# Altium PCB BatteryManagementSystem.PcbDoc (part 2 of 2)
Units mil, origin at the board's own origin, x right, y up, seen from the top; angles counter-clockwise.
Board outline 5250 x 2500 mil, 4 copper layers (Top Layer, GND, 3V3, Bottom Layer); 232 components, 168 nets, 723 pads, 227 vias.
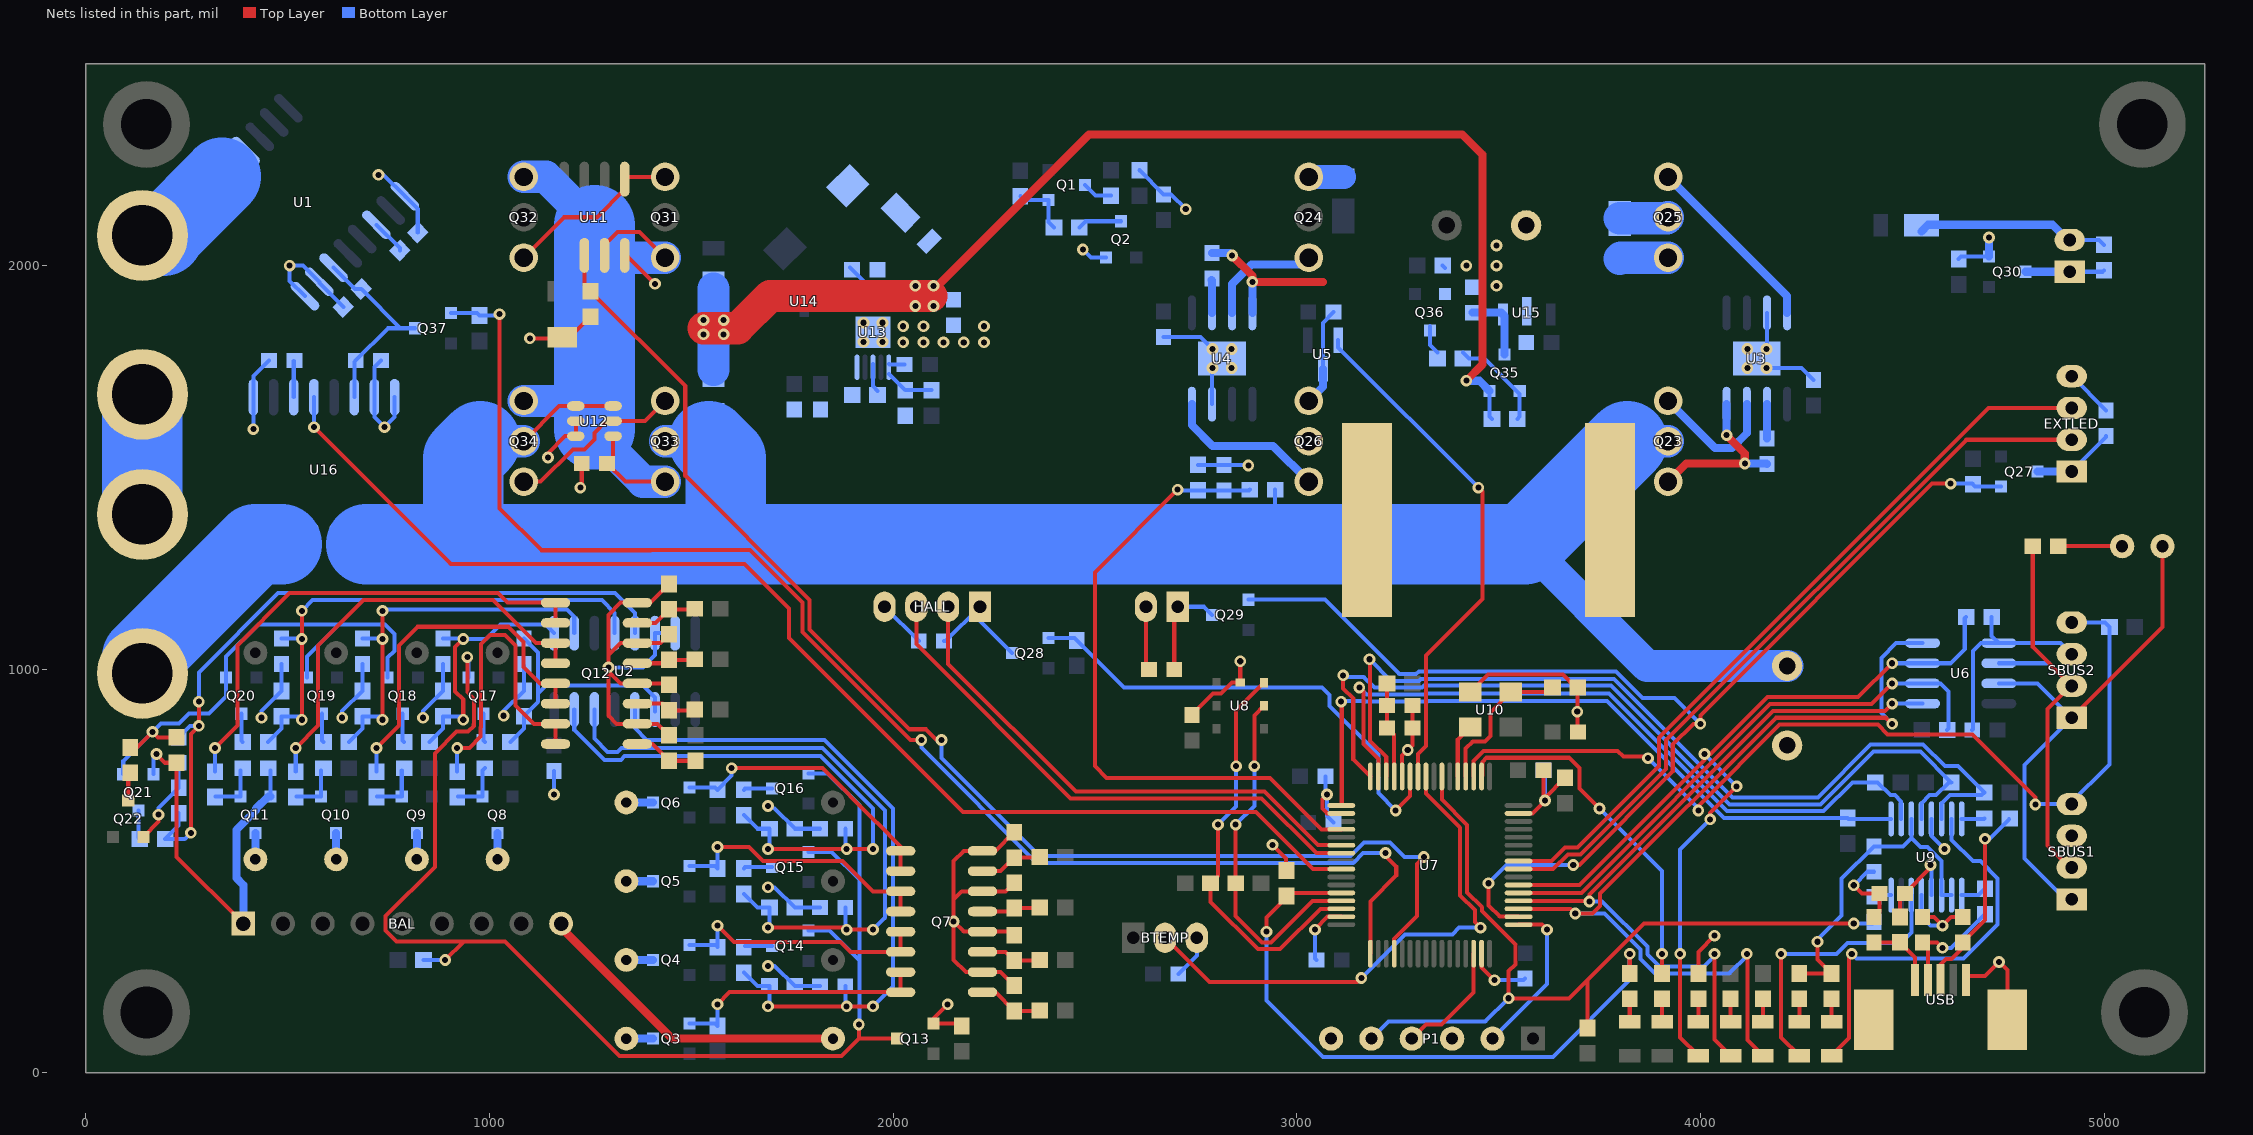
[diagram p4: the nets of this part, all layers, seen from the top]

## Via types
v1: diameter 29, hole 15, Top Layer to Bottom Layer, tented both sides, 227 vias

## Nets (pads, with @x,y where several pads share a name; then routed paths per layer and width w, separated by ;. In a path a pad name is that pad's centre, name@x,y a point inside that pad or via, vN(x,y) a via of type N, cw(c..) or ccw(c..) an arc to the next point about the centre after c; other vN are vias at no path point) (continued)
C8: BAL.1 Q11.S Q21.S R25.1 R51.1 | length 1002.7
  Top Layer w10: v1(175,790) 196.5,768.5 R51.1@225,768.5 225,535 BAL.1@390,370
  Bottom Layer w10: Q21.S@167.4,740.08 167.4,782.4 v1(175,790) ; Q11.S@457.4,685.08 R25.1@457.4,749.09
  Bottom Layer w20: BAL.1@390,370 390,466.04 373.47,482.57 373.47,602.36 421.87,650.76 421.87,655 451.95,685.08 Q11.S@457.4,685.08
CGND: BAL.9 R14.2 | length 811.6
  Top Layer w20: BAL.9@1167.4,370 BAL.9@1177.4,360 ; BAL.9@1177.4,370 BAL.9@1177.4,360 ; R14.2@1850.91,85 1452.4,85 BAL.9@1177.4,360
CLK8MHZ: U7.5 U10.3 | length 135.1
  Top Layer w10: U7.5@3398.9,734.49 3398.9,825.59 U10.3@3430,856.69
CLK_EN: R83.2 U7.4 U10.1 | length 380.9
  Top Layer w10: U7.4@3418.58,734.49 3418.58,803.58 3436.07,821.07 3466.07,821.07 3480,835 3480,893.31 U10.1@3530,943.31 3621.81,943.31 R83.2@3633.5,955
DEBUG_CTS: R75.2 U7.14 U9.6 | length 2236.3
  Top Layer w10: v1(3180,1025) 3182,1023 3182,822.04 3221.73,782.31 U7.14@3221.73,734.49
  Bottom Layer w10: v1(3180,1025) 3233.5,971.5 3303.02,971.5 3308.02,976.5 3785.62,976.5 4079.63,682.5 4290.92,682.5 4421.92,813.5 4552.04,813.5 4605.54,760 4638.5,760 4646.82,751.69 4647.14,751.69 4654.17,744.66 4654.17,744.34 R75.2@4703.5,695 4696.82,688.31 4618.2,688.31 4597.5,667.62 U9.6@4597.5,629.49
DEBUG_RTS: R74.2 U7.15 U9.2 | length 1803.8
  Top Layer w10: v1(3155,955) 3165,945 3165,815 3202.05,777.95 U7.15@3202.05,734.49
  Bottom Layer w10: v1(3155,955) 3172.5,937.5 3317.1,937.5 3319.6,940 3774.04,940 4065.55,648.5 4305,648.5 4376.5,720 R74.2@4433.5,720 4439.17,720 4470.86,688.31 4481.69,688.31 4497.5,672.5 U9.2@4497.5,629.49
DEBUG_RXI: R72.2 U7.17 U9.1 | length 1743.3
  Top Layer w10: v1(3110,920) 3111.5,918.5 3111.5,663.63 U7.17@3110.51,662.64
  Bottom Layer w10: v1(3110,920) 3111.5,921.5 3164.46,921.5 3165.46,920.5 3324.14,920.5 3325.14,921.5 3768.5,921.5 4058.5,631.5 R72.2@4365,631.5 4367.01,629.49 U9.1@4472.5,629.49
DEBUG_TXO: R73.2 U7.16 U9.4 | length 2141.2
  Top Layer w10: v1(3115,985) 3115,952.48 3140,927.48 3140,776.85 U7.16@3182.36,734.49
  Bottom Layer w10: v1(3115,985) 3118.5,981.5 3165.98,981.5 3192.98,954.5 3310.06,954.5 3315.06,959.5 3778.58,959.5 4072.59,665.5 4297.96,665.5 4428.96,796.5 4545,796.5 R73.2@4621.5,720 4615.83,720 4584.14,688.31 4568.2,688.31 4547.5,667.62 U9.4@4547.5,629.49
DISCHARGE_EN: R86.1 U7.36 U11.2 | length 3242.1
  Top Layer w10: U11.2@1235,2025.51 1235,1951.5 R86.1@1250,1936.5 1485,1701.5 1485,1479.6 1792.5,1172.1 1792.5,1099.16 2040.16,851.5 2080.98,851.5 2107.48,825 v1(2120,825) ; U7.36@3241.42,295.51 3241.42,332.38 3297.5,388.46 3297.5,517.5 v1(3315,535)
  Bottom Layer w10: v1@2110,825 2120,815 2120,780 2362.5,537.5 3132.96,537.5 3166.96,571.5 3230.98,571.5 3267.48,535 v1(3315,535)
EXTLED_5V_E\N\: Q27.G Q29.G R61.2 U7.50 | length 3118
  Top Layer w10: v1(3475,470) 3475.5,469.5 3475.5,414.5 3502.95,387.05 U7.50@3549.49,387.05 ; v1(3685,515) 3700,515 3931.5,746.5 3931.5,813.98 3982.52,865 v1(4000,865) 4000,885.96 4574.04,1460 v1(4620,1460)
  Bottom Layer w10: Q29.G@2880.08,1172.4 3070.07,1172.4 3253.98,988.5 3295.98,988.5 3302.48,995 3791.17,995 3856.67,929.5 3935.5,929.5 v1@3992.5,872.5 ; v1(3475,470) 3520,515 v1(3685,515) ; v1(4620,1460) 4673.5,1460 R61.2@4675,1458.5 4680.91,1452.6 Q27.G@4744.92,1452.6
EXTLED_CLK: EXTLED.2 U7.56 | length 1853.1
  Top Layer w10: U7.56@3549.49,505.16 3615.16,505.16 3615,505 3635,505 3671.5,541.5 3702.46,541.5 3914.5,753.54 3914.5,824.5 4658.74,1568.74 EXTLED.2@4920,1568.74
EXTLED_DATA: EXTLED.3 U7.57 | length 1877.1
  Top Layer w10: U7.57@3549.49,524.84 3630.8,524.84 3664.46,558.5 3695.42,558.5 3897.5,760.58 3897.5,831.54 4713.44,1647.48 EXTLED.3@4920,1647.48
GND: BAT.- BTEMP.3 C1.2 C2.2 C3.2 C4.2 C5.2 C6.2 C7.2 C8.2 C9.2 C10.2 C11.2 C12.2 C13.2 C14.2 C15.2 C16.2 C19.2 C20.1 C21.2 C22.2 C23.1 C24.1 C25.2 C26.2 C27.2 C28.2 C29.2 C31.2 C32.2 C33.2 C34.2 C35.2 C36.2 C37.2 C38.2 C39.2 C40.2 C41.1 C42.1 C44.2 C45.2 C46.2 C48.2 C49.2 C50.2 C51.2 C52.2 D2.A D5.A EXTLED.4 FAN.2 HALL.4 P1.3 Q2.S Q7.10 Q7.12 Q7.14 Q7.16 Q12.10 Q12.12 Q12.14 Q12.16 Q13.S Q22.S Q25.S Q26.S Q30.S Q36.S R4.2 R5.2 R18.2 R19.2 R20.2 R21.2 R38.2 R39.2 R40.2 R41.2 R47.2 R48.2 R49.2 R50.2 R57.2 R58.2 R59.2 R60.2 R64.2 R67.2 R68.2 R81.2 R82.2 R83.1 R86.2 R87.2 R89.2 R92.2 R94.2 RAIL.- SBUS1.3 SBUS2.3 U1.9 U1.15 U1.16 U2.6 U2.7 U3.7 U4.7 U5.3 U6.5 U7.12 U7.18 U7.31 U7.47 U7.63 U8.7 U9.5 U9.13 U10.2 U11.4 U12.2 U12.3 U13.10 U13.PAD U14.1 U15.2 U16.9 U16.15 U16.16 USB.5 USB.SHD | length 10236
  Top Layer w10: Q22.S@142.4,584.92 180,622.52 v1(180,640) ; v1(1100,1820) 1177.09,1820 C41.1@1180,1822.91 1199.41,1822.91 R86.2@1250,1873.5 ; v1(1145,1525) 1145,1535 1187.6,1577.6 U12.3@1213.74,1577.6 U12.2@1213.74,1615 ; v1(1225,1450) 1228.5,1453.5 C42.1@1228.5,1510 ; U11.4@1335,2000 U11.4@1335,2025.51 1339.49,2025.51 v1(1410,1955) ; R38.2@1445,836.5 1416.5,865 Q12.10@1366.38,865 1315,865 1295,885 v1@1295,995 ; R39.2@1445,961.5 1441.5,965 Q12.12@1366.38,965 1325,965 v1@1295,995 ; R40.2@1445,1086.5 1423.5,1065 Q12.14@1366.38,1065 1325,1065 1295,1035 ; R41.2@1445,1211.5 1398.5,1165 Q12.16@1366.38,1165 1325,1165 1295,1135 1295,1035 ; v1(2135,170) 2100.08,135.08 Q13.S@2100.08,122.4 2164.09,122.4 R5.2@2170,116.5 ; R18.2@2300,216.5 2266.5,250 Q7.10@2221.38,250 2180,250 2150,280 v1(2150,375) ; R19.2@2300,341.5 2291.5,350 Q7.12@2221.38,350 2175,350 v1(2150,375) ; R20.2@2300,471.5 2278.5,450 Q7.14@2221.38,450 2170,450 2150,430 ; R21.2@2300,596.5 2253.5,550 Q7.16@2221.38,550 2175,550 2150,525 2150,430 ; FAN.2@2626.26,1155 2626.26,1007.24 C22.2@2633.5,1000 ; C25.2@2740,886.5 2740,887.68 2792.32,940 2812.48,940 2839.57,967.09 U8.7@2860,967.09 v1(2860,1020) ; BTEMP.3@2752.48,335 BTEMP.3@2752.48,359.02 ; v1(2940,565) 2973.5,531.5 R81.2@2973.5,501.5 ; v1(3045,355) 3045,355.72 3076.33,387.05 U7.31@3110.51,387.05 ; v1(3075,690) 3064.06,679.06 3064.06,655.22 3075.05,644.24 3075.05,642.95 U7.18@3110.51,642.95 ; U7.12@3261.1,734.49 3261.1,786.1 3286.5,811.5 C38.2@3286.5,900 ; U10.2@3430,943.31 3473.38,986.69 3659.14,986.69 3690.83,955 R83.1@3696.5,955 3695,953.5 v1(3695,895) 3695,846.5 C37.2@3696.5,845 ; U7.47@3457.95,295.51 3457.95,261.33 3489.28,230 v1(3490,230) ; U7.63@3549.49,642.95 3583.67,642.95 3615,674.28 v1(3615,675) ; C40.2@3621.5,750 C40.2@3611.5,750 3611.5,678.5 v1(3615,675) ; R82.2@3665,731.5 3615,681.5 v1(3615,675) ; R68.2@3995,246.5 3995,300 v1(4035,340) ; v1(4380,465) 4400,445 C29.2@4443.5,445 4443.5,400 C26.2@4430,386.5 ; C27.2@4550,386.5 4578.5,386.5 v1(4600,365) 4621.5,386.5 C28.2@4650,386.5 ; USB.5@4657.99,240 4705,240 v1(4740,275) ; v1@4746.5,281.5 v1(4740,275) ; USB.SHD@4760.35,141.57 4760.35,254.65 v1(4740,275) ; v1@1295,995 v1(1295,1005) 1295,1035 ; v1(2150,375) 2150,430
  Bottom Layer w10: v1(180,640) 180,656.5 R60.2@230,706.5 C12.2@230,768.5 C12.2@230.22,768.5 ; v1(415,1595) U16.9@415,1674.13 415,1726.5 C51.2@453.5,1765 ; v1(435,880) 435,896.5 R59.2@485,946.5 C11.2@485,1013.5 ; U1.16@542.92,1924.59 505,1962.51 v1(505,2000) 538.22,2000 U1.15@578.28,1959.94 578.28,1957.18 C1.2@637.73,1897.73 ; v1(635,880) 635,896.5 R58.2@685,946.5 C10.2@685,1013.5 ; v1(725,2225) 737.49,2225 U1.9@790.41,2172.08 822.27,2140.22 C3.2@822.27,2082.27 ; C50.2@731.5,1765 715,1748.5 U16.15@715,1674.13 715,1625 v1(740,1600) 765,1625 U16.16@765,1674.13 ; v1(835,880) 835,896.5 R57.2@885,946.5 C9.2@885,1013.5 ; v1(1035,885) 1035,896.5 R50.2@1085,946.5 C8.2@1085,1010 ; v1(1160,690) C2.2@1160,748.5 ; v1(1295,1005) 1380,1005 1410,1035 U2.6@1410,1089.49 U2.7@1460,1089.49 ; v1(1690,265) 1706.5,265 R47.2@1756.5,215 C5.2@1818.5,215 ; v1(1690,460) 1706.5,460 R48.2@1756.5,410 C6.2@1818.5,410 ; v1@1690,655 v1(1690,661.25) ; 1706.5,655 R49.2@1756.5,605 C7.2@1818.5,605 ; HALL.4@1978.78,1154.72 C21.2@2063.5,1070 ; v1(2470,2040) 2490.08,2019.92 Q2.S@2527.6,2019.92 ; R4.2@2610,2236.5 C4.2@2670,2176.5 2688.5,2176.5 v1(2725,2140) ; C16.2@2670,1823.5 2761.5,1823.5 v1(2791.38,1793.62) ; C20.1@2706.5,245 2752.48,290.98 BTEMP.3@2752.48,335 BTEMP.3@2752.48,360 ; R94.2@2755,1506.5 C52.2@2820,1506.5 2878.5,1506.5 v1(2880,1505) ; U4.7@2790,1656.81 2790,1745 v1(2791.38,1746.38) ; v1(3045,355) 3045,283.5 C32.2@3048.5,280 ; U5.3@3065,1744.57 3065,1858.5 C23.1@3091.5,1885 ; C36.2@3071.5,735 3071.5,693.5 v1(3075,690) 3075,636.5 C35.2@3091.5,620 ; R92.2@3361.5,2000 R92.2@3367.4,1994.09 ; v1(3490,230) 3561.5,230 C33.2@3565,233.5 ; C34.2@3611.5,750 3615,746.5 v1(3615,675) ; v1(4163.62,1746.38) 4250.12,1746.38 C15.2@4280,1716.5 ; v1(4163.62,1793.62) 4165,1795 U3.7@4165,1883.19 ; v1(4380,465) 4413.5,498.5 C31.2@4430,498.5 ; U9.13@4547.5,440.51 4547.5,387.5 4570,365 v1(4600,365) ; U9.5@4572.5,629.49 4572.5,587.5 v1(4605,555) ; R64.2@4640,2016.5 4645.91,2022.4 Q30.S@4714.92,2022.4 ; C24.1@4673.5,850 4675,851.5 4675,1045 4695,1065 U6.5@4739.49,1065 ; v1@4714.92,2069.92 v1(4715,2070) ; R67.2@4721.5,1130 4721.5,1082.99 U6.5@4739.49,1065 ; SBUS2.3@4920,1037.48 4892.48,1065 U6.5@4739.49,1065 ; EXTLED.4@4920,1726.22 4920.28,1726.22 C19.2@5005,1641.5
  Bottom Layer w20: Q26.S@3030,1665 3065,1700 U5.3@3065,1744.57 ; Q30.S@4714.92,2022.4 v1@4714.92,2069.92
  Bottom Layer w80: D2.A@3800,2017.01 3802.99,2020 Q25.S@3920,2020
  Bottom Layer w200: RAIL.-@140,1383.7 BAT.-@140,1681.3
  other v1: 3275,800 2838.62,1746.38 4116.38,1746.38 2838.62,1793.62 4116.38,1793.62 2025,1810 2075,1810 2125,1810 2175,1810 2225,1810 1926.38,1811.38 1973.62,1811.38 2025,1850 2075,1850 2225,1850 1926.38,1858.62 1973.62,1858.62 3495,1950 3420,2000 3495,2000 3495,2050
HALL_3V3_E\N\: Q28.G R62.2 U7.11 | length 1208
  Top Layer w10: v1(3245,650) 3280.79,685.79 U7.11@3280.79,734.49
  Bottom Layer w10: Q28.G@2385.08,1077.4 2449.09,1077.4 R62.2@2455,1071.5 2571.5,955 3062.48,955 3081.5,935.98 3081.5,909.04 3202,788.54 3202,693 v1(3245,650)
HALL_CHARGE: HALL.3 U7.23 | length 1360.1
  Top Layer w10: HALL.3@2057.52,1155 2057.52,1062.48 2439.83,680.17 2912.92,680.17 3048.56,544.53 U7.23@3110.51,544.53
HALL_DISCHARGE: HALL.2 U7.22 | length 1301.7
  Top Layer w10: HALL.2@2136.26,1155 2136.26,1013.74 2452.83,697.17 2919.96,697.17 3052.91,564.21 U7.22@3110.51,564.21
I2C_SCL: R69.2 U7.29 U8.5 | length 882
  Top Layer w10: v1(2848.5,615) R69.2@2848.5,470 2848.5,389.02 2914.02,323.5 2935.98,323.5 3038.89,426.42 U7.29@3110.51,426.42 ; v1(2895,760) 2895,885.94 U8.5@2919.06,910
  Bottom Layer w10: v1(2848.5,615) 2895,661.5 v1(2895,760)
I2C_SDA: R70.2 U7.30 U8.6 | length 1012.5
  Top Layer w10: v1(2805,615) 2805,488.5 R70.2@2786.5,470 2786.5,423.5 2903.5,306.5 2959.02,306.5 3059.26,406.73 U7.30@3110.51,406.73 ; v1(2850,760) 2850,898.03 U8.6@2919.06,967.09
  Bottom Layer w10: v1(2805,615) 2850,660 v1(2850,760)
ISENS_3V3_E\N\: Q37.G R95.2 U7.33 | length 3514.9
  Top Layer w10: v1(1025,1880) 1025,1399 1129,1295 1399.05,1295 1399.22,1295.17 1645.39,1295.17 1775.5,1165.06 1775.5,1092.12 2042.62,825 v1(2070,825) ; U7.33@3182.36,295.51 3182.36,424.89 3246.5,489.02 3246.5,510.98 3220,537.48 v1(3220,545)
  Bottom Layer w10: Q37.G@905.08,1882.4 969.09,1882.4 R95.2@975,1876.5 1021.5,1876.5 v1(1025,1880) ; v1(2070,825) 2070,805.96 2355.46,520.5 3140,520.5 3164.5,545 v1(3220,545)
LED1: R81.1 R84.2 U7.28 | length 1563.5
  Top Layer w10: v1@2920.75,354.25 2925,358.5 2925,385 2986.1,446.1 U7.28@3110.51,446.1 ; R84.2@3825,246.5 v1(3825,295)
  Bottom Layer w10: v1(2925,350) 2925,180 3065,40 3635,40 3825,230 v1(3825,295)
LED2: R85.2 U7.2 | length 885.5
  Top Layer w10: U7.2@3457.95,734.49 3459.73,736.27 3459.73,770.45 3470.22,780.94 3674.06,780.94 3700,755 3700,705 v1(3750,655) ; R85.2@3905,246.5 v1(3905,295)
  Bottom Layer w10: v1(3750,655) 3905,500 v1(3905,295)
NetBAT_+: BAT.+ U1.1 U1.2 U1.3 U1.4 | length 257.8
  Bottom Layer w193: BAT.+@192,2075 337.5,2220.5
  Bottom Layer w200: BAT.+@140,2075 BAT.+@192,2075
NetBUZZER_1: BUZZER.1 Q30.D R63.2 | length 196.4
  Bottom Layer w10: BUZZER.1@4910,1985 4996.5,1985 R63.2@5000,1988.5
  Bottom Layer w20: Q30.D@4805.08,1985 BUZZER.1@4910,1985
NetBUZZER_2: BUZZER.2 D3.C R63.1 | length 480.1
  Bottom Layer w10: BUZZER.2@4910,2063.74 4987.76,2063.74 R63.1@5000,2051.5
  Bottom Layer w20: D3.C@4547.4,2085 4563.9,2101.5 4872.24,2101.5 BUZZER.2@4910,2063.74
NetC1_1: C1.1 C50.1 Q37.D U1.14 U16.14 | length 500
  Bottom Layer w10: U1.14@613.63,1995.3 666.66,1942.27 C1.1@682.27,1942.27 779.54,1845 ; U16.14@665,1674.13 665,1761.5 C50.1@668.5,1765 748.5,1845 779.54,1845 ; Q37.D@814.92,1845 779.54,1845
NetC3_1: C3.1 U1.11 | length 87.7
  Bottom Layer w10: U1.11@719.7,2101.37 777.73,2043.34 C3.1@777.73,2037.73
NetC5_1: C5.1 R43.2 R47.1 U2.12 | length 1719.2
  Top Layer w10: v1(1690,165) v1(1885,165) v1(1950,165)
  Bottom Layer w10: U2.12@1360,900.51 1360,854.5 1389.5,825 1830,825 1999.5,655.5 1999.5,214.5 v1(1950,165) ; R43.2@1630,248.5 1663.5,215 R47.1@1693.5,215 1693.5,168.5 v1(1690,165) ; C5.1@1881.5,215 1881.5,168.5 v1(1885,165)
NetC6_1: C6.1 R44.2 R48.1 U2.14 | length 1628.3
  Top Layer w10: v1(1690,360) 1880,360 v1(1885,355) v1(1950,355)
  Bottom Layer w10: U2.14@1260,900.51 1260,828.28 1292.78,795.5 1317.22,795.5 1326.72,805 1825,805 1979.5,650.5 1979.5,384.5 v1(1950,355) ; R44.2@1630,443.5 1663.5,410 R48.1@1693.5,410 1693.5,363.5 v1(1690,360) ; C6.1@1881.5,410 1881.5,358.5 v1(1885,355)
NetC7_1: C7.1 R45.2 R49.1 U2.15 | length 1419.4
  Top Layer w10: v1(1690,555) v1(1885,555) v1(1950,555)
  Bottom Layer w10: U2.15@1210,900.51 1210,850 1284.5,775.5 1325.5,775.5 1335,785 1820,785 1950,655 v1(1950,555) ; R45.2@1630,638.5 1663.5,605 R49.1@1693.5,605 1693.5,558.5 v1(1690,555) ; C7.1@1881.5,605 1881.5,558.5 v1(1885,555)
NetC8_1: C8.1 R46.2 R50.1 U2.11 | length 644.6
  Bottom Layer w10: R46.2@1051.5,820 1085,853.5 R50.1@1085,883.5 1085,884.93 1119.69,919.61 1119.69,940 ; C8.1@1085,1076.5 1119.69,1041.81 1119.69,940 ; U2.11@1410,895.51 1410,930 1380,960 1139.69,960 1119.69,940
NetC9_1: C9.1 R53.2 R57.1 U2.1 | length 647.1
  Top Layer w10: v1(935,875) 935,925 915,945 915,1055 v1(935,1075)
  Bottom Layer w10: R53.2@851.5,820 885,853.5 R57.1@885,883.5 926.5,883.5 v1(935,875) ; C9.1@885,1076.5 933.5,1076.5 v1(935,1075) 991.12,1075 1027.3,1111.18 1138.31,1111.18 U2.1@1160,1089.49
NetC10_1: C10.1 R54.2 R58.1 U2.2 | length 975.6
  Top Layer w10: v1(735,875) v1(735,1075) v1(735,1145)
  Bottom Layer w10: R54.2@651.5,820 685,853.5 R58.1@685,883.5 726.5,883.5 v1(735,875) ; C10.1@685,1076.5 733.5,1076.5 v1(735,1075) ; v1(735,1145) 737.8,1147.8 1192.2,1147.8 1210,1130 U2.2@1210,1089.49
NetC11_1: C11.1 R55.2 R59.1 U2.4 | length 1286.9
  Top Layer w10: v1(535,875) v1(535,1075) v1(535,1145)
  Bottom Layer w10: R55.2@451.5,820 485,853.5 R59.1@485,883.5 v1@526.5,883.5 ; C11.1@485,1076.5 v1@533.5,1076.5 ; v1(535,1145) 561.5,1171.5 1278.5,1171.5 1310,1140 U2.4@1310,1089.49
NetC12_1: C12.1 R56.2 R60.1 U2.5 | length 1846.3
  Top Layer w10: v1(260,595) 260,840 v1(280,860) v1(280,920)
  Bottom Layer w10: R60.1@230,643.5 230,613.5 R56.2@196.5,580 245,580 v1(260,595) ; C12.1@230,831.5 258.5,860 v1(280,860) ; v1(280,920) 280,992.16 476.34,1188.5 1311.5,1188.5 1360,1140 U2.5@1360,1089.49
NetC17_1: C17.1 D2.C L1.1 Q23.S Q25.D U3.4 | length 550.8
  Top Layer w20: Q23.S@3920,1465 3965,1510 v1(4110,1510) 4110,1535 v1(4065,1580)
  Bottom Layer w20: v1(4065,1580) U3.4@4065,1656.81 ; v1(4110,1510) 4163.5,1510 C17.1@4165,1508.5
  Bottom Layer w80: D2.C@3800,2117.4 3917.4,2117.4 Q25.D@3920,2120
NetC17_2: C17.2 U3.2 | length 85.3
  Bottom Layer w20: C17.2@4165,1571.5 U3.2@4165,1656.81
NetC18_1: C18.1 D1.A L1.2 Q24.S Q26.D U4.4 | length 477.2
  Top Layer w20: v1(2840,2025) 2890,1975 v1(2890,1960) 3065,1960
  Bottom Layer w20: C18.1@2790,2031.5 2833.5,2031.5 v1(2840,2025) ; U4.4@2890,1883.19 v1(2890,1960)
  Bottom Layer w60: Q24.S@3030,2220 D1.A@3117.01,2220
NetC18_2: C18.2 U4.2 | length 82.4
  Bottom Layer w20: C18.2@2788.5,1965 2790,1963.5 U4.2@2790,1883.19
NetC19_1: C19.1 EXTLED.1 Q27.D | length 208.6
  Bottom Layer w10: EXTLED.1@4920,1490 5005,1575 C19.1@5005,1578.5
  Bottom Layer w20: Q27.D@4835.08,1490 EXTLED.1@4920,1490
NetC21_1: C21.1 HALL.1 Q28.D | length 271.8
  Bottom Layer w10: C21.1@2126.5,1070 2130,1070 HALL.1@2215,1155 2215,1119.92 Q28.D@2294.92,1040
NetC22_1: C22.1 FAN.1 Q29.D | length 251.7
  Top Layer w10: C22.1@2696.5,1000 2696.5,1146.5 FAN.1@2705,1155
  Bottom Layer w10: FAN.1@2705,1155 2769.92,1155 Q29.D@2789.92,1135
NetC26_1: C26.1 FB1.2 USB.1 | length 173.8
  Top Layer w10: C26.1@4430,323.5 FB1.2@4495,323.5 4495,323.15 4532.01,286.14 USB.1@4532.01,230
NetC27_1: C27.1 R78.1 USB.2 | length 284.3
  Top Layer w10: USB.2@4563.5,240 4563.5,310 C27.1@4550,323.5 4586.5,323.5 v1(4600,310)
  Bottom Layer w10: v1(4600,310) 4621.5,310 R78.1@4705,393.5
NetC28_1: C28.1 R79.1 USB.3 | length 483.6
  Top Layer w10: USB.3@4595,230 4595,268.5 4608.75,282.25 4622.25,282.25 4650,310 C28.1@4650,323.5 4705,378.5 v1(4705,580)
  Bottom Layer w10: v1(4705,580) 4716.5,580 R79.1@4765,628.5
NetC29_1: C29.1 FB1.1 U9.12 | length 235.1
  Top Layer w10: FB1.1@4495,386.5 4495,433.5 C29.1@4506.5,445 4570,508.5 v1(4570,515)
  Bottom Layer w10: v1(4570,515) 4572.5,512.5 U9.12@4572.5,440.51
NetC30_1: C30.1 U9.16 | length 33.5
  Bottom Layer w10: C30.1@4439.02,440.51 U9.16@4472.5,440.51
NetC38_1: C38.1 C39.1 FB2.1 U7.13 | length 234.7
  Top Layer w10: FB2.1@3223.5,955 3223.5,845 3235,845 3241.42,838.58 U7.13@3241.42,734.49
NetC42_2: C42.2 Q31.S Q32.S Q33.S Q34.S U11.3 U12.4 | length 1626.3
  Top Layer w10: U11.3@1285,2025.51 1285,2051.84 1316.98,2083.82 1371.18,2083.82 Q31.S@1435,2020 ; U12.4@1306.26,1577.6 1306.26,1524.76 C42.2@1291.5,1510 1336.5,1465 Q33.S@1435,1465
  Bottom Layer w80: Q34.S@1085,1665 1190,1665 ; Q32.S@1085,2220 1140,2220 1260,2100 ; 1260,1595 1260,1585 1380,1465 Q33.S@1435,1465 ; 1330,2020 Q31.S@1435,2020
  Bottom Layer w200: 1260,1595 1260,2100
NetC43_1: C43.1 U13.2 | length 88.6
  Bottom Layer w10: C43.1@1893.5,1995 1930.31,1958.19 U13.2@1930.31,1921.61
NetC43_2: C43.2 D5.C L2.1 U13.3
NetC44_1: C44.1 D4.C D6.C Q35.S R90.2 U13.4 U13.5 | length 3077.6
  Top Layer w20: 2095,1935 2485,2325 3410,2325 3460,2275 3460,1755 v1(3420,1715) ; v1@2095,1940 v1@2095,1955
  Top Layer w80: 1530,1845 1615,1845 1695,1925 2095,1925
  Bottom Layer w10: Q35.S@3477.6,1689.92 3477.6,1625.91 R90.2@3483.5,1620
  Bottom Layer w20: v1@3420.08,1714.92 v1(3420,1715) 3452.52,1715 Q35.S@3477.6,1689.92
  Bottom Layer w80: D4.C@1555,1742.4 D6.C@1555,1942.6
  other v1: 1530,1830 1580,1830 1530,1865 1580,1865 2055,1900 2100,1900 2055,1950 2100,1950
NetC47_1: C47.1 R88.2 R89.1 U13.6 | length 162.4
  Bottom Layer w10: U13.6@1989.37,1732.13 R89.1@2030,1691.5 R88.2@2095,1691.5 ; U13.6@1989.37,1756.85 1991.22,1755 C47.1@2028.5,1755
NetC48_1: C48.1 Q35.D U15.3 | length 178.5
  Bottom Layer w20: C48.1@3435,1883.5 3506.57,1883.5 U15.3@3510.94,1879.13 3515,1875.08 Q35.D@3515,1780.08
NetC51_1: C51.1 U16.11 | length 89.4
  Bottom Layer w10: U16.11@515,1674.13 C51.1@515,1763.5
NetGP1_C: GP1.C R84.1 | length 56.2
  Top Layer w10: GP1.C@3825,127.32 R84.1@3825,183.5
NetGP2_C: GP2.C R85.1 | length 56.2
  Top Layer w10: GP2.C@3905,127.32 R85.1@3905,183.5
NetQ1_D: Q1.D R3.1 | length 75.9
  Bottom Layer w10: Q1.D@2475.08,2200 2501.57,2173.5 R3.1@2540,2173.5
NetQ1_G: Q1.G R1.2 R2.1 | length 147
  Bottom Layer w10: R1.2@2315,2172.01 2324.41,2162.6 Q1.G@2384.92,2162.6 2384.92,2108.58 R2.1@2398.5,2095
NetQ2_D: Q2.D R2.2 | length 109.7
  Bottom Layer w10: R2.2@2461.5,2095 2476.57,2110.08 Q2.D@2565,2110.08
NetQ3_D: Q3.D R14.1 | length 65.8
  Bottom Layer w20: R14.1@1339.09,85 Q3.D@1404.92,85
NetQ3_G: Q3.G Q7.7 R6.2 | length 641.9
  Top Layer w10: v1(1565,170) 1595,200 Q7.7@2018.62,200 Q7.7@2018.62,250
  Bottom Layer w10: Q3.G@1495.08,122.4 1559.09,122.4 R6.2@1565,116.5 v1(1565,170)
NetQ4_D: Q4.D R15.1 | length 65.8
  Bottom Layer w20: R15.1@1339.09,280 Q4.D@1404.92,280
NetQ4_G: Q4.G Q7.5 R7.2 | length 648.1
  Top Layer w10: v1(1565,365) 1605.47,324.53 1869.35,324.53 1893.88,300 Q7.5@2018.62,300 Q7.5@2018.62,350
  Bottom Layer w10: Q4.G@1495.08,317.4 R7.2@1559.09,317.4 ; R7.2@1565,311.5 v1(1565,365)
NetQ5_D: Q5.D R16.1 | length 65.8
  Bottom Layer w20: R16.1@1339.09,475 Q5.D@1404.92,475
NetQ5_G: Q5.G Q7.3 R8.2 | length 675.1
  Top Layer w10: v1(1565,560) 1643.28,560 1677.78,525.5 1874.5,525.5 1950,450 Q7.3@2018.62,450 Q7.3@2018.62,400
  Bottom Layer w10: Q5.G@1495.08,512.4 1559.09,512.4 R8.2@1565,506.5 v1(1565,560)
NetQ6_D: Q6.D R17.1 | length 65.8
  Bottom Layer w20: R17.1@1339.09,670 Q6.D@1404.92,670
NetQ6_G: Q6.G Q7.1 R9.2 | length 700.6
  Top Layer w10: v1(1600,755) 1824.79,755 1960.63,619.17 1960.83,619.17 2018.62,561.38 Q7.1@2018.62,550 Q7.1@2018.62,500
  Bottom Layer w10: Q6.G@1495.08,707.4 1559.09,707.4 R9.2@1565,701.5 1600,736.5 v1(1600,755)
NetQ7_9: Q7.9 R10.2 R18.1 | length 159.9
  Top Layer w10: Q7.9@2221.38,200 2253.5,200 R18.1@2300,153.5 R10.2@2362.01,153.5
NetQ7_11: Q7.11 R11.2 R19.1 | length 149.5
  Top Layer w10: Q7.11@2221.38,300 2278.5,300 R19.1@2300,278.5 R11.2@2362.01,278.5
NetQ7_13: Q7.13 R12.2 R20.1 | length 144.2
  Top Layer w10: Q7.13@2221.38,400 2291.5,400 R20.1@2300,408.5 R12.2@2362.01,408.5
NetQ7_15: Q7.15 R13.2 R21.1 | length 154.5
  Top Layer w10: Q7.15@2221.38,500 2266.5,500 R21.1@2300,533.5 R13.2@2362.01,533.5
NetQ8_D: Q8.D R34.1 | length 65.8
  Bottom Layer w20: R34.1@1020,529.09 Q8.D@1020,594.92
NetQ8_G: Q8.G R22.2 R26.1 | length 133.4
  Bottom Layer w10: R26.1@921.57,685.08 Q8.G@982.6,685.08 982.6,749.09 R22.2@988.5,755
NetQ9_D: Q9.D R35.1 | length 65.8
  Bottom Layer w20: R35.1@820,529.09 Q9.D@820,594.92
NetQ9_G: Q9.G R23.2 R27.1 | length 125
  Bottom Layer w10: R27.1@721.57,685.08 Q9.G@782.6,685.08 R23.2@782.6,749.09
NetQ10_D: Q10.D R36.1 | length 65.8
  Bottom Layer w20: R36.1@620,529.09 Q10.D@620,594.92
NetQ10_G: Q10.G R24.2 R28.1 | length 125
  Bottom Layer w10: R28.1@521.57,685.08 Q10.G@582.6,685.08 R24.2@582.6,749.09
NetQ11_D: Q11.D R37.1 | length 65.8
  Bottom Layer w20: R37.1@420,529.09 Q11.D@420,594.92
NetQ11_G: Q11.G R25.2 R29.1 | length 125
  Bottom Layer w10: R29.1@321.57,685.08 Q11.G@382.6,685.08 R25.2@382.6,749.09
NetQ12_1: Q12.1 R29.2 | length 1237.2
  Top Layer w10: v1(320,805) 375.47,860.47 375.47,1059.35 504.62,1188.5 1021.5,1188.5 1045,1165 Q12.1@1163.62,1165 Q12.1@1163.62,1115
  Bottom Layer w10: R29.2@320,746.5 v1(320,805)
NetQ12_3: Q12.3 R28.2 | length 1064.5
  Top Layer w10: v1(520,805) 575.47,860.47 575.47,1059.35 687.62,1171.5 1008.95,1171.5 1115.45,1065 Q12.3@1163.62,1065 Q12.3@1163.62,1015
  Bottom Layer w10: R28.2@520,746.5 v1(520,805)
NetQ12_5: Q12.5 R27.2 | length 887.7
  Top Layer w10: v1(720,805) 775.47,860.47 775.47,1059.35 821.56,1105.43 1046.73,1105.43 1084.53,1067.63 1084.53,1005.47 1125,965 Q12.5@1163.62,965 Q12.5@1163.62,915
  Bottom Layer w10: R27.2@720,746.5 v1(720,805)
NetQ12_7: Q12.7 R26.2 | length 780.9
  Top Layer w10: v1(920,805) 950,805 978,833 978,856.48 978.5,856.98 978.5,1023.68 ; 978.47,1023.7 978.47,1058.11 ; 978.5,1058.13 978.5,1062.38 1001.56,1085.43 1038.44,1085.43 1064.53,1059.35 1064.53,910.47 1110,865 Q12.7@1163.62,865 Q12.7@1163.62,815
  Bottom Layer w10: R26.2@920,746.5 v1(920,805)
NetQ12_9: Q12.9 R30.2 R38.1 | length 160.8
  Top Layer w10: Q12.9@1366.38,815 1403.5,815 R38.1@1445,773.5 R30.2@1510,773.5
NetQ12_11: Q12.11 R31.2 R39.1 | length 147.5
  Top Layer w10: Q12.11@1366.38,915 1428.5,915 R39.1@1445,898.5 R31.2@1507.01,898.5
NetQ12_13: Q12.13 R32.2 R40.1 | length 132.1
  Top Layer w10: Q12.13@1366.38,1015 R40.1@1436.5,1015 ; R40.1@1445,1023.5 R32.2@1507.01,1023.5
NetQ12_15: Q12.15 R33.2 R41.1 | length 154.5
  Top Layer w10: Q12.15@1366.38,1115 1411.5,1115 R41.1@1445,1148.5 R33.2@1507.01,1148.5
NetQ13_D: Q13.D Q14.G Q15.G Q16.G Q17.G R42.2 | length 3423
  Top Layer w10: v1(890,280) 935,325 ; v1(945,1030) 945,943.28 961.5,926.78 961.5,864.02 961,863.52 961,859.28 947.22,845.5 918.78,845.5 864.53,791.25 864.53,510.65 742.17,388.3 742.17,352.8 769.5,325.47 1038.57,325.47 1322.04,42 1872,42 1915,85 ; v1(1915,120) 1915,85 ; Q13.D@2009.92,85 1915,85
  Bottom Layer w10: R42.2@836.5,280 v1(890,280) ; v1(945,1030) 947.6,1027.4 Q17.G@947.6,980.08 ; Q14.G@1790.08,352.4 1842.6,352.4 1916.18,278.82 ; Q15.G@1790.08,547.4 1847.6,547.4 1916.18,478.82 ; Q16.G@1790.08,742.4 1837.6,742.4 1916.18,663.82 1916.18,478.82 ; v1(1915,120) 1916.18,121.18 1916.18,278.82 ; 1916.18,278.82 1916.18,478.82
NetQ14_D: Q14.D R43.1 | length 66.4
  Bottom Layer w10: R43.1@1633.5,315 Q14.D@1699.92,315
NetQ15_D: Q15.D R44.1 | length 71.4
  Bottom Layer w10: R44.1@1630,506.5 1633.5,510 Q15.D@1699.92,510
NetQ16_D: Q16.D R45.1 | length 71.4
  Bottom Layer w10: R45.1@1630,701.5 1633.5,705 Q16.D@1699.92,705
NetQ17_D: Q17.D R46.1 | length 71.4
  Bottom Layer w10: Q17.D@985,889.92 985,823.5 R46.1@988.5,820
NetQ18_D: Q18.D R53.1 | length 71.4
  Bottom Layer w10: Q18.D@785,889.92 785,823.5 R53.1@788.5,820
NetQ18_G: Q18.G Q19.G Q20.G Q21.G R51.2 R52.1 | length 1340.8
  Top Layer w10: R52.1@110,820 R52.1@110,806.5 126.5,806.5 v1(165,845) 178.5,831.5 R51.2@225,831.5
  Bottom Layer w10: Q21.G@92.6,740.08 92.6,772.6 v1(165,845) 186.18,866.18 231.18,866.18 255.5,890.5 305.5,890.5 347.6,932.6 Q20.G@347.6,980.08 347.6,1031.48 427.3,1111.18 627.3,1111.18 ; Q19.G@547.6,980.08 547.6,1031.48 627.3,1111.18 ; Q18.G@747.6,980.08 747.6,1028.98 764.5,1045.88 764.5,1087.22 740.54,1111.18 627.3,1111.18
NetQ19_D: Q19.D R54.1 | length 71.4
  Bottom Layer w10: Q19.D@585,889.92 585,823.5 R54.1@588.5,820
NetQ20_D: Q20.D R55.1 | length 71.4
  Bottom Layer w10: Q20.D@385,889.92 385,823.5 R55.1@388.5,820
NetQ21_D: Q21.D R56.1 | length 66.4
  Bottom Layer w10: R56.1@130,583.5 Q21.D@130,649.92
NetQ22_D: Q22.D R52.2 | length 70.5
  Top Layer w10: Q22.D@105,675.08 105,738.06 110,743.06 R52.2@110,743.5
NetQ23_G: Q23.G U3.3 | length 330.2
  Bottom Layer w20: Q23.G@3920,1665 4036.5,1548.5 4078.5,1548.5 4115,1585 U3.3@4115,1656.81
NetQ24_G: Q24.G U4.3 | length 288.7
  Bottom Layer w20: U4.3@2840,1883.19 2840,1955 2888,2003 3013,2003 Q24.G@3030,2020
NetQ25_G: Q25.G U3.8 | length 459
  Bottom Layer w20: Q25.G@3920,2220 4215,1925 U3.8@4215,1883.19
NetQ26_G: Q26.G U4.8 | length 399.8
  Bottom Layer w20: U4.8@2740,1656.81 2740,1605 2791.5,1553.5 2941.5,1553.5 Q26.G@3030,1465
NetQ31_G: Q31.G Q32.G U11.5 | length 448.3
  Top Layer w10: Q32.G@1085,2020 1185,2120 1266.84,2120 1335,2188.16 U11.5@1335,2214.49 1340.51,2220 Q31.G@1435,2220
NetQ33_G: Q33.G Q34.G U12.5 | length 442.7
  Top Layer w10: Q34.G@1085,1465 1126.72,1465 1206.72,1545 1235.82,1545 1260,1569.18 1260,1586.02 1288.98,1615 U12.5@1306.26,1615 1385,1615 Q33.G@1435,1665
NetQ35_G: Q35.G R90.1 R91.2 | length 248.4
  Bottom Layer w10: R91.2@3411.5,1785 3426.5,1770 3465,1770 3552.4,1682.6 3552.4,1625.91 R90.1@3546.5,1620
NetQ36_D: Q36.D R91.1 | length 72.6
  Bottom Layer w10: Q36.D@3330,1849.92 3330,1803.5 R91.1@3348.5,1785
NetR68_1: R68.1 TE.C | length 56.2
  Top Layer w10: TE.C@3995,127.32 R68.1@3995,183.5
NetR71_1: R71.1 TERM.1 | length 160.6
  Top Layer w10: R71.1@4886.5,1305 5040,1305 TERM.1@5045,1310
NetR71_2: R71.2 SBUS1.2 SBUS2.2 U6.6 | length 1089.6
  Top Layer w10: R71.2@4823.5,1305 4823.5,1055.24 SBUS2.2@4920,958.74 4916.77,958.74 4860,901.97 4860,563.74 SBUS1.2@4915,508.74
  Bottom Layer w10: U6.6@4739.49,1015 4863.74,1015 SBUS2.2@4920,958.74
NetR76_2: R76.2 URX.A | length 56.2
  Top Layer w10: URX.A@4245,127.32 R76.2@4245,183.5
NetR77_2: R77.2 UTX.A | length 56.2
  Top Layer w10: UTX.A@4325,127.32 R77.2@4325,183.5
NetR78_2: R78.2 U9.9 | length 64.1
  Bottom Layer w10: U9.9@4647.5,440.51 4689.02,440.51 R78.2@4705,456.5
NetR79_2: R79.2 U9.8 | length 56.2
  Bottom Layer w10: U9.8@4647.5,629.49 4702.99,629.49 R79.2@4703.5,630
NetR87_1: R87.1 U13.8 | length 71.6
  Bottom Layer w10: U13.8@1950,1756.85 1950,1701.5 R87.1@1961.5,1690
NetR96_2: R96.2 RX.A | length 56.2
  Top Layer w10: RX.A@4075,127.32 R96.2@4075,183.5
NetR97_2: R97.2 TX.A | length 56.2
  Top Layer w10: TX.A@4155,127.32 R97.2@4155,183.5
NetRAIL_+: RAIL.+ U16.5 U16.6 U16.7 U16.8 | length 501
  Bottom Layer w200: RAIL.+@140,990 140,1030 420,1310 485,1310
NetSBUS1_1: SBUS1.1 SBUS2.1 TERM.2 U6.7 | length 1284.2
  Top Layer w10: SBUS2.1@4920,880 5145,1105 TERM.2@5145,1305
  Bottom Layer w10: U6.7@4739.49,965 4835,965 SBUS2.1@4920,880 4803.5,763.5 4803.5,531.5 4905,430 SBUS1.1@4915,430
NetU9_7: U9.7 UTX.C | length 994.4
  Top Layer w10: UTX.C@4325,42.68 4368.43,86.11 4368.43,288.43 v1(4375,295)
  Bottom Layer w10: v1(4375,295) 4386.5,283.5 4652.32,283.5 4736.69,367.86 4736.69,482.14 4693.82,525 4675,525 4622.5,577.5 U9.7@4622.5,629.49
NetU9_14: U9.14 URX.C | length 707.9
  Top Layer w10: v1(4200,295) 4200,87.68 URX.C@4245,42.68
  Bottom Layer w10: v1(4200,295) 4337.52,295 4364.02,321.5 4496,321.5 4522.5,348 U9.14@4522.5,440.51
NRST: C30.2 P1.5 R80.2 U7.7 | length 2114.7
  Top Layer w10: U7.7@3359.53,734.49 3359.53,676.99 3422,614.52 3422,447.04 3458.5,410.54 3458.5,401.5 3541.5,318.5 3541.5,268.5 3525,252 v1(3525,185) 3675,185 3720,230 ; R80.2@3720,111.5 3720,230 ; v1(4380,370) 4282.52,370 3860,370 3720,230
  Bottom Layer w10: P1.5@3185,85 3227,127 3467,127 v1(3525,185) ; v1(4380,370) 4426.5,370 C30.2@4430,373.5
RAIL+: C13.1 D4.A Q23.D Q33.D Q34.D R93.1 U12.1 U12.6 U16.1 U16.2 U16.3 U16.4 | length 5252.8
  Top Layer w10: Q34.D@1085,1565 1172.4,1652.4 U12.1@1213.74,1652.4 U12.6@1306.26,1652.4
  Bottom Layer w10: 2946.5,1314.37 R93.1@2946.5,1445
  Bottom Layer w80: 977.11,1565 Q34.D@1085,1565 ; Q33.D@1435,1565 1542.89,1565 ; 3565.07,1311.5 3868.14,1008.43 C13.1@4215,1008.43 ; 3818.57,1565 Q23.D@3920,1565
  Bottom Layer w200: 695,1310 1585,1310 ; 935,1310.87 935,1522.89 977.11,1565 ; 1542.89,1565 1585,1522.89 1585,1310.87 1585.63,1311.5 ; 1585.63,1310 3565.07,1310 ; 3565.07,1311.5 3818.57,1565
RAIL_I: U7.25 U16.12 | length 3116
  Top Layer w10: v1(565,1600) 904,1261 1413.14,1261 1413.3,1261.17 1631.31,1261.17 1741.5,1150.98 1741.5,1078.03 2173.37,646.17 2898.83,646.17 3039.84,505.16 U7.25@3110.51,505.16
  Bottom Layer w10: v1(565,1600) U16.12@565,1674.13
RAIL_V: C52.1 R93.2 R94.1 U7.20 | length 1625
  Top Layer w10: v1(2705,1445) 2500,1240 2500,760 2528.83,731.17 2934.04,731.17 3061.63,603.58 U7.20@3110.51,603.58
  Bottom Layer w10: v1(2705,1445) 2706.5,1443.5 R94.1@2755,1443.5 C52.1@2820,1443.5 2882.01,1443.5 R93.2@2883.5,1445
SUBBUS_RE: R66.2 U6.2 U7.53 | length 1385.2
  Top Layer w10: U7.53@3549.49,446.1 3705.14,446.1 4173.04,914 4424,914 v1(4475,965)
  Bottom Layer w10: v1(4475,965) U6.2@4550.51,965 4595,965 4615,945 4615,853.5 R66.2@4611.5,850
SUBBUS_RXI: RX.C U6.1 U7.52 | length 1875.4
  Top Layer w10: U7.52@3549.49,426.42 v1@3723.58,426.42 ; v1(3725,425) 3725,441.92 4180.08,897 4457,897 v1(4475,915) ; v1@4035,290 4035,82.68 RX.C@4075,42.68
  Bottom Layer w10: v1(3725,425) 3756.52,425 3868.5,313.02 3868.5,294.02 3899.02,263.5 4008.5,263.5 v1@4035,290 ; v1(4475,915) U6.1@4550.51,915
  other v1: 4035,295
SUBBUS_TE: R67.1 TE.A U6.3 U7.54 | length 2294.8
  Top Layer w10: U7.54@3549.49,465.79 3700.79,465.79 4010,775 v1(4010,790) 4025,790 4166,931 4391,931 v1(4475,1015) ; v1(3950,295) 3950,87.68 TE.A@3995,42.68 ; v1(4024.22,628.31) 4024.22,644.22 v1(4090,710)
  Bottom Layer w10: v1(3950,295) 3950,554.09 v1(4024.22,628.31) ; v1(4010,790) v1(4090,710) ; v1(4475,1015) U6.3@4550.51,1015 4620,1015 4655,1050 4655,1126.5 R67.1@4658.5,1130
SUBBUS_TXO: TX.C U6.4 U7.51 | length 2232.9
  Top Layer w10: U7.51@3549.49,406.73 3678.27,406.73 v1(3690,395) 3732.48,395 3751.5,414.02 3751.5,444.38 4187.12,880 4460,880 v1(4475,865) ; v1@4115,290 4116.43,288.57 4116.43,81.25 TX.C@4155,42.68
  Bottom Layer w10: v1(3690,395) 3762.48,395 3851.5,305.98 3851.5,282 3887,246.5 4071.5,246.5 v1@4117.5,292.5 ; v1(4475,865) 4448.5,891.5 4448.5,1028.5 4485,1065 U6.4@4550.51,1065
  other v1: 4115,295
SWCLK: P1.2 U7.49 | length 401.6
  Top Layer w10: U7.49@3549.49,367.36 3607.64,367.36 v1(3620,355)
  Bottom Layer w10: P1.2@3485,85 3620,220 v1(3620,355)
SWDIO: P1.4 U7.46 | length 296.9
  Top Layer w10: P1.4@3285,85 3320,120 3359.04,120 3438.27,199.23 U7.46@3438.27,295.51
SWO: P1.6
TEMP_BAT: BTEMP.2 U7.9 | length 1306
  Top Layer w10: BTEMP.2@2673.74,335 2783.74,225 3150,225 v1(3160,235) ; U7.9@3320.16,734.49 3320.16,692.32 3405,607.48 3405,440 3441.5,403.5 3441.5,373.5 v1@3450,365
  Bottom Layer w10: v1(3160,235) 3268.5,343.5 3385.98,343.5 3402.48,360 v1(3455,360)
TEMP_FETS: U5.2 U7.10 | length 1281
  Top Layer w10: U7.10@3300.47,734.49 3300.47,790.47 3320,810 3320,1034.04 3460,1174.04 v1@3460,1440
  Bottom Layer w10: U5.2@3102.4,1815.43 3102.4,1797.6 v1(3450,1450)
U3V3: C31.1 R76.1 R77.1 U9.3 U9.10 U9.11 | length 831
  Top Layer w10: R76.1@4250,251.5 R76.1@4245,246.5 R77.1@4325,246.5 4290,281.5 v1(4290,325)
  Bottom Layer w10: v1(4290,325) 4290,330 4350,390 4350,481.5 C31.1@4430,561.5 4501.5,561.5 4522.5,582.5 ; U9.3@4522.5,629.49 4522.5,582.5 ; U9.10@4622.5,440.51 U9.11@4597.5,440.51 4597.5,524.98 4562.48,560 4545,560 4522.5,582.5
WKUP: R65.2 SBUS1.4 SBUS2.4 U7.3 | length 2355.2
  Top Layer w10: U7.3@3438.27,734.49 3438.27,773.03 3463.18,797.94 3794.59,797.94 3809.02,783.5 3866.5,783.5 v1(3870,780) ; v1(3995,650) 3995,661.44 4196.56,863 4439.52,863 4464.02,838.5 4673.98,838.5 4830,682.48 v1(4830,665)
  Bottom Layer w10: v1(3870,780) 3995,655 v1(3995,650) ; v1(4830,665) 4831.22,666.22 4915,666.22 5013.5,764.72 R65.2@5013.5,1105 5002.28,1116.22 SBUS2.4@4920,1116.22
pads on no net: U1.10 U1.13 U2.8 U7.6 U8.1 U8.4 U9.15 U11.6 U11.7 U11.8 U13.7 U13.9 U16.10 U16.13 USB.4
copper on no net: | length 5
  Bottom Layer w10: 1756.5,133.5 1760,130

## Polygon pours and split planes (outlines as drawn)
3V3 on Bottom Layer "Switcher3V3" (solid, pour order 15): 1695,1875 1675,1855 1675,1735 1730,1680 1770,1680 1785,1695 1785,1739.76 1820,1774.76 1820,1850 1795,1875
NetC43_2 on Bottom Layer "Switcher" (solid, pour order 13): 1960,1895 1960,1955 2015,2010 2015,2045 2090,2120 2090,2175 2005,2260 1860,2260 1759.85,2159.85 1940,1974.24 1940,1895
GND on Bottom Layer "SwitcherGND" (solid, pour order 16): 1830,2230 1615,2015 1615,1645 1700,1560 2165,1560 2250,1645 2250,2015 2035,2230
GND on Bottom Layer "15VGND" (solid, pour order 11): 3330,1885 3350,1865 3390,1865 3410,1885 3410,1915 3530,1915 3530,1825 3550,1805 3585,1805 3610,1830 3610,2115 3585,2140 3545,2140 3435,2030 3350,2030 3330,2010
NetC44_1 on Bottom Layer "Switcher" (solid, pour order 12): 1965,1880 2175,1880 2175,1955 2145,1985 1990,1985 1965,1960
5V on Bottom Layer "Switcher" (solid, pour order 14): 1915,1895 1915,2015 1765,2165 1650,2050 1740,1960 1790,1960 1800,1950 1800,1880 1825,1855 1825,1770 1790,1735 1790,1680 1835,1680 1855,1700 1855,1835
NetC18_1 on Top Layer "Top Layer-No Net" (solid, pour order 10): 3375,2300 3445,2230 3445,1210 3335,1100 3025,1100 2915,1210 2915,2230 2985,2300
NetC17_1 on Top Layer "Top Layer-No Net" (solid, pour order 9): 3575,2300 3505,2230 3505,1210 3615,1100 3925,1100 4035,1210 4035,2230 3965,2300
GND on GND (split plane): 5229.9,20.1 20.1,20.1 20.1,2479.9 5229.9,2479.9
3V3 on 3V3 (split plane): 5229.9,20.1 20.1,20.1 20.1,2479.9 5229.9,2479.9

## Other copper
Bottom Layer:
  rectangle net NetRAIL_+: 490,1210 580,1410
  region net RAIL+: 695,1410 600,1410 600,1210 695,1210
  region net NetBAT_+: 403,2150 476.5,2223.5 340,2360 266.5,2286.5
  region net BAT+: 491.92,2238.08 552.6,2298.75 415.68,2435.67 355,2375
3V3 (plane layer: these items are gaps in the copper):
  rectangle: 4116.38,1746.38 4163.62,1793.62
  rectangle: 2791.38,1746.38 2838.62,1793.62
  rectangle: 2775,1830 2845,1850
  rectangle: 4105,1830 4175,1850
  rectangle: 3100,1045 3850,1725
  rectangle: 3490,1980 3590,2030
  rectangle: 2055,1900 2100,1950
  rectangle: 1926.38,1811.38 2075,1858.62
GND (plane layer: these items are gaps in the copper):
  rectangle: 3100,1045 3850,1725
  rectangle: 2055,1900 2100,1950

## Silkscreen, mask and mechanical layers (free items; w line width, h text height)
Top Overlay:
  text "Battery Management Board - Machine Intelligence Lab" at 295,2420 h60
  text "Rev 0.1" at 3875,2420 h60
  text "-CD+" at 1985,970 h60
Bottom Overlay:
  text "Matt Thompson 2013" at 4950,2420 h60
Bottom Solder:
  rectangle: 485,1235 580,1385
  region: 695,1385 600,1385 600,1235 695,1235
  region: 384,2169 457.5,2242.5 357.5,2342.5 284,2269
  region: 436.71,2421.71 372.5,2357.5 475,2255 539.21,2319.21